# Allegro board maxm86161_adptr_evkit_b.brd
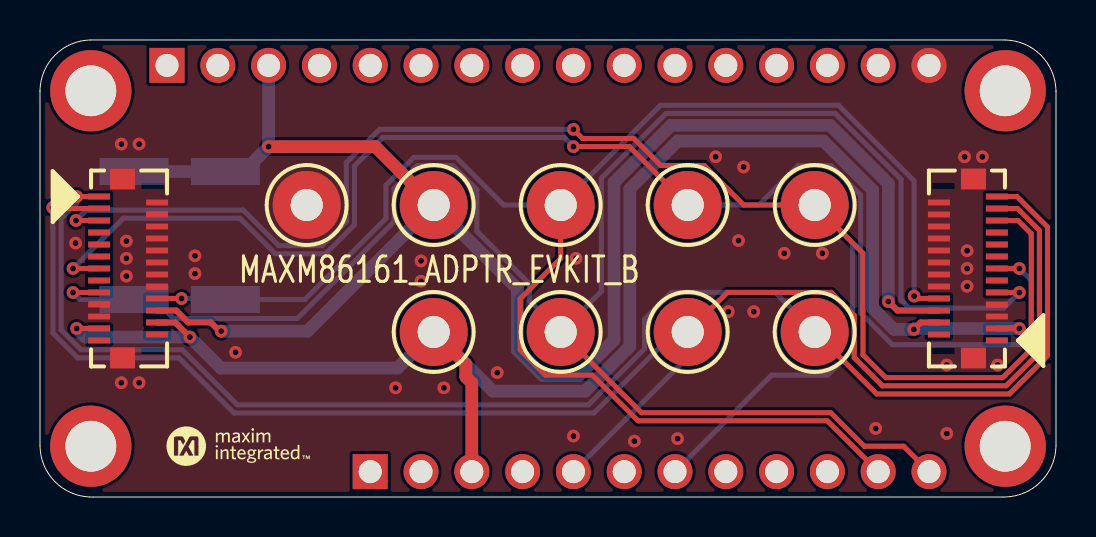
[diagram p0: board, top side]
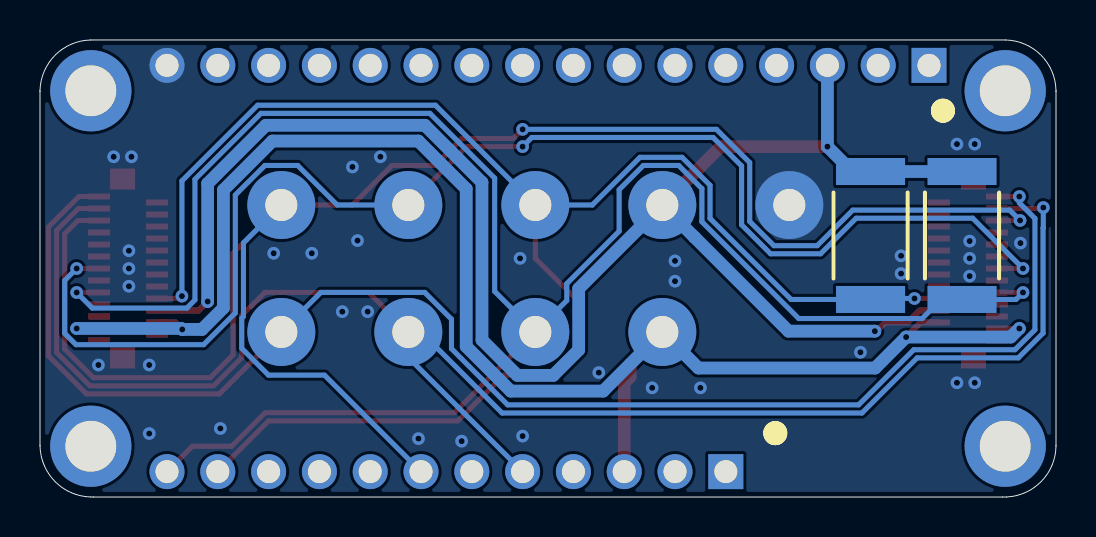
[diagram p1: board, bottom side, seen from below]

Outline 50.8 x 22.86 mm; copper layers: TOP, BOTTOM. Coordinates in mm from the lower left corner of the outline.
Outline path: 0,20.27 0,2.6 0,2.55 arc(0.74,0.78) 2.48,0 2.67,0 48.13,0 48.25,0 arc(50.04,0.76) 50.8,2.55 50.8,2.6 50.8,20.27 50.8,20.33 arc(50.04,22.1) 48.27,22.86 48.15,22.86 2.52,22.86 arc(0.75,22.1) 0,20.33 0,20.27

## Design rules (mm)
constraint set DEFAULT: min track width 0.254

## Placement (name value [footprint] x y rotation side)
ACCINTN  N/A  [KEYS_5013]  38.73 8.25 0 top
GND  N/A  [KEYS_5011]  13.33 14.61 0 top
J1  5016162575  [MOLEX_501616-2575]  4.45 11.43 270 top
J2  5016162575  [MOLEX_501616-2575]  46.35 11.43 90 top
J3  PBC12SAAN  [SULLINS_PXC12SAAN]  16.51 1.27 0 bottom
J4  PBC16SAAN  [SULLINS_PXC16SAAN]  6.35 21.59 0 bottom
MFIO  N/A  [KEYS_5127]  38.73 14.61 0 top
NOREF  -  []  12.7 -12.7 0 top
NOREF#2  -  []  154.05 1.27 0 top
NOREF#3  -  []  48.26 0 90 top
NOREF#4  -  [unnamed#2]  2.54 2.54 0 top
NOREF#5  -  [unnamed#2]  48.26 2.54 0 top
NOREF#6  -  []  0.54 1 0 top
NOREF#7  -  []  0 20.27 0 top
NOREF#8  -  [unnamed#2]  2.54 20.32 0 top
NOREF#9  -  []  7.3 2.54 0 top
NOREF#10  -  [unnamed#2]  48.26 20.32 0 top
NOREF#11  -  []  27.94 60.96 0 top
OPTINT  N/A  [KEYS_5126]  32.38 14.61 0 top
R1  10K  [RESC6432X76M]  4.7 13.08 270 bottom
R2  10K  [RESC6432X76M]  9.27 13.08 270 bottom
RSTN  N/A  [KEYS_5014]  32.38 8.25 0 top
SCL  N/A  [KEYSTONE_5128]  26.04 14.61 0 top
SDA  N/A  [TP_C340H160]  26.04 8.25 0 top
UNK1V8  N/A  [KEYS_5011]  19.68 14.61 0 top
VLED  N/A  [KEYS_5012]  19.68 8.25 0 top

## Library data of the parts
ACCINTN = TP: part number: TP_TP-KEYS_5013,N/A,02-TPMINI5013-00
GND UNK1V8 = TP: alternate symbols: TP_C340H160L; part number: TP_TP-KEYS_5011,N/A,02-TPMINI5011-00
J1 J2 = 501616-2575: part number: 501616-2575_RA-MOLEX_501616-2575,5016162575,01-501616257525P-29
J3 = HEADER_12P: part number: HEADER_12P_SIP-SULLINS_PXC12SAAN,PBC12SAAN,01-PBC12SAAN12P-21
J4 = HEADER_16P: part number: HEADER_16P_SIP-SULLINS_PXC16SAAN,PBC16SAAN,01-PBC16SAAN16P-21
MFIO = TP: part number: TP_TP-KEYS_5127,N/A,02-TPMULTI5127-00
OPTINT = TP: part number: TP_TP-KEYS_5126,N/A,02-TPMULTI5126-00
R1 R2 = RES: part number: RES_2512RES-RESC6432X76M,10K,80-0010K-AA72
RSTN = TP: part number: TP_TP-KEYS_5014,N/A,02-TPMINI5014-00
SCL = TP: part number: TP_TP-KEYSTONE_5128,N/A,02-TPMULTI5128-00
SDA = TP: part number: TP_TP-TP_C340H160,N/A,02-TPMINI5125-00
VLED = TP: part number: TP_TP-KEYS_5012,N/A,02-TPMINI5012-00

## Footprints (pads in the part's own frame, mm; a bottom-side part is the same pattern mirrored in y, then rotated)
KEYS_5011
  round 3.4 hole 1.6: 1(0,0)
KEYS_5012
  round 3.4 hole 1.6: 1(0,0)
KEYS_5013
  round 3.4 hole 1.6: 1(0,0)
KEYS_5014
  round 3.4 hole 1.6: 1(0,0)
KEYS_5126
  round 3.4 hole 1.6: 1(0,0)
KEYS_5127
  round 3.4 hole 1.6: 1(0,0)
KEYSTONE_5128
  round 3.4 hole 1.6: 1(0,0)
MOLEX_501616-2575
  rect 0.3x1.1 smd: 1(-3.6,-1.5) 2(-3.3,1.4) 3(-3,-1.5) 4(-2.7,1.4) 5(-2.4,-1.5) 6(-2.1,1.4) 7(-1.8,-1.5) 8(-1.5,1.4) 9(-1.2,-1.5) 10(-0.9,1.4) 11(-0.6,-1.5) 12(-0.3,1.4) 13(0,-1.5) 14(0.3,1.4) 15(0.6,-1.5) 16(0.9,1.4) 17(1.2,-1.5) 18(1.5,1.4) 19(1.8,-1.5) 20(2.1,1.4) 21(2.4,-1.5) 22(2.7,1.4) 23(3,-1.5) 24(3.3,1.4) 25(3.6,-1.5)
  rect 1.05x1.25 smd: 26(-4.475,-0.325) 27(4.475,-0.325)
RESC6432X76M
  rect 1.35x3.45 smd: 1(-3.2,0) 2(3.2,0)
SULLINS_PXC12SAAN
  rect 1.75x1.75 hole 1.15: 1(0,0)
  round 1.75 hole 1.15: 2(2.54,0) 3(5.08,0) 4(7.62,0) 5(10.16,0) 6(12.7,0) 7(15.24,0) 8(17.78,0) 9(20.32,0) 10(22.86,0) 11(25.4,0) 12(27.94,0)
SULLINS_PXC16SAAN
  rect 1.75x1.75 hole 1.15: 1(0,0)
  round 1.75 hole 1.15: 2(2.54,0) 3(5.08,0) 4(7.62,0) 5(10.16,0) 6(12.7,0) 7(15.24,0) 8(17.78,0) 9(20.32,0) 10(22.86,0) 11(25.4,0) 12(27.94,0) 13(30.48,0) 14(33.02,0) 15(35.56,0) 16(38.1,0)
TP_C340H160
  round 3.4 hole 1.6: 1(0,0)
unnamed#2
  round 4.064 hole 2.54: (0,0)

## Nets
1V8: J1.20 J2.6 J4.3 R1.1 R2.1 UNK1V8.1
GND_SIGNAL_1: GND.1(TP1) J1.2 J1.4 J1.6 J1.8 J1.10 J1.12 J1.14 J1.16 J1.19 J1.21 J1.26 J1.27 J2.5 J2.7 J2.10 J2.12 J2.14 J2.16 J2.18 J2.20 J2.22 J2.24 J2.26 J2.27 J4.16
ACCINTN: ACCINTN.1(TP1) J1.1 J2.25
MFIO: J1.5 J2.21 J3.7 MFIO.1(TP1)
OPTINT: J1.13 J2.13 OPTINT.1(TP1)
RSTN: J1.3 J2.23 J3.5 RSTN.1(TP1)
SCL: J1.18 J2.8 J3.11 R2.2 SCL.1(TP1)
SDA: J1.17 J2.9 J3.12 R1.2 SDA.1(TP1)
VLED: J1.22 J1.23 J2.3 J2.4 J3.3 VLED.1(TP1)

Pads without a net: J1 7 9 11 15 24 25; J2 1 2 11 15 17 19; J3 1 2 4 6 8 9 10; J4 1 2 4 5 6 7 8 9 10 11 12 13 14 15

## Via types
v1: diameter 0.635, hole 0.305, TOP to BOTTOM, 54 vias

## Routing (per net, layer and track width the routed paths; a pad name or vN(x,y) marks a point on that pad's centre or on a via; arc(x,y) is an arc through that point)
1V8: length 85.3
  TOP w0.305: v1(9.06,8.3) 8.98,8.3 8.54,8.74 7.4,8.74 6.81,9.33 J1.20 ; v1(42.42,9.78) 42.87,9.33 J2.6
  TOP w0.635: UNK1V8.1 16.76,17.53 v1(11.43,17.53)
  BOTTOM w0.635: J4.3 v1(11.43,17.53) 10.18,16.28 R2.1 R1.1 ; v1(9.06,8.3) 13.38,8.3 18.08,13 UNK1V8.1 23.87,10.42 23.87,7.36 25.14,6.09 26.93,6.09 28.7,7.85 28.7,15.74 31.55,18.59 39.5,18.59 42.42,15.68 v1(42.42,9.78)
GND_SIGNAL_1:
  vias: v1(1.78,12.7) v1(4.06,17.65) v1(4.06,5.71) v1(4.32,12.8) v1(4.32,11.94) v1(4.32,11.05) v1(4.95,17.65) v1(4.95,5.71) v1(7.75,12.06) v1(7.75,11.18) v1(9.78,7.24) v1(17.78,5.46) v1(19.05,11.81) v1(19.05,10.79) v1(20.19,5.46) v1(22.86,6.22) v1(26.67,3.05) v1(26.8,11.94) v1(29.72,2.79) v1(31.88,2.92) v1(33.78,17.02) v1(34.42,9.27) v1(34.92,12.83) v1(35.18,16.51) v1(35.69,9.27) v1(37.21,12.19) v1(39.12,12.19) v1(41.78,3.43) v1(45.34,6.6) v1(45.34,3.17) v1(46.23,17.02) v1(46.35,12.32) v1(46.35,11.43) v1(46.35,10.54) v1(47.12,17.02) v1(47.88,6.6)
ACCINTN: length 74.7
  TOP w0.254: J1.1 v1(1.83,15.03) ; ACCINTN.1 41.83,5.16 48.47,5.16 50.38,7.06 50.38,13.5 48.85,15.03 J2.25
  BOTTOM w0.254: v1(1.83,15.03) 1.83,14.71 1.05,13.93 1.05,8.36 2.05,7.37 7.11,7.37 9.87,4.61 27.42,4.61 30.23,7.42 30.23,8.9 31.57,10.23 36.76,10.23 ACCINTN.1
MFIO: length 90
  TOP w0.254: J1.5 1.92,13.83 1.91,13.83 v1(1.8,13.83) ; v1(26.67,18.39) 27.13,17.93 29.69,17.93 31.04,16.58 33.21,16.58 35.18,14.61 MFIO.1 41.15,12.19 41.15,7.11 42.29,5.97 48.13,5.97 49.56,7.4 49.56,13.17 48.9,13.83 J2.21
  BOTTOM w0.254: v1(1.8,13.83) 2.31,14.35 10.16,14.35 11.94,12.57 14.1,12.57 15.31,13.78 15.31,16.73 16.98,18.39 v1(26.67,18.39) ; MFIO.1 40.63,12.71 40.63,9.04 40.71,8.95 40.71,7.43 39.38,6.1 36.58,6.1 J3.7
OPTINT: length 69.4
  TOP w0.254: v1(26.67,17.53) 29.46,17.53 OPTINT.1 ; J1.13 v1(1.65,11.43) ; J2.13 v1(48.97,11.43)
  BOTTOM w0.254: v1(1.65,11.43) 4.17,13.94 9.99,13.94 11.77,12.17 14.27,12.17 15.72,13.62 15.72,16.56 17.14,17.98 26.21,17.98 v1(26.67,17.53) ; v1(48.97,11.43) 49.56,10.83 49.56,8.18 49,7.62 42.62,7.62 41.03,9.21 41.03,15.11 39.56,16.58 37.91,16.58 35.94,14.61 OPTINT.1
RSTN: length 84
  TOP w0.254: RSTN.1 34.36,10.23 39.56,10.23 40.71,9.08 40.71,6.97 42.12,5.56 48.3,5.56 49.97,7.23 49.97,13.34 48.88,14.43 J2.23 ; J1.3 0.68,14.43 v1(0.63,14.48)
  BOTTOM w0.254: J3.5 32.38,6.98 RSTN.1 31.75,8.25 27.7,4.2 9.7,4.2 6.94,6.96 1.88,6.96 0.65,8.2 0.65,13.45 0.63,13.46 v1(0.63,14.48)
SCL: length 82
  TOP w0.254: J2.8 43.82,9.93 v1(43.7,10.05) ; J1.18 v1(7.08,9.93) ; SCL.1 26.04,11.94 24,9.91 24,7.37 25.27,6.1 27.62,6.1 29.91,3.81 39.37,3.81 J3.11
  BOTTOM w0.254: v1(43.7,10.05) 43.7,15.81 39.92,19.6 31.03,19.6 SCL.1 23.19,14.61 20.8,16.99 18.7,16.99 17.3,15.59 17.3,13.94 13.24,9.88 R2.2 9.18,9.88 9.14,9.93 8.34,9.93 8.33,9.93 v1(7.08,9.93)
SDA: length 96.6
  TOP w0.254: J1.17 v1(1.65,10.23) ; J3.12 43.18,2.54 41.21,2.54 39.54,4.22 30.07,4.22 SDA.1 ; J2.9 v1(48.97,10.23)
  BOTTOM w0.254: v1(48.97,10.23) 48.19,9.45 43.46,9.45 43.05,9.86 43.05,15.89 39.75,19.19 31.31,19.19 28.07,15.95 28.07,10.29 SDA.1 24.46,9.83 24.46,10.67 21.84,13.29 21.84,15.37 20.63,16.58 18.86,16.58 17.71,15.43 17.71,13.77 12.86,8.93 6.69,8.93 5.74,9.88 R1.2 2,9.88 v1(1.65,10.23)
VLED: length 80.5
  TOP w0.254: J1.23 v1(1.83,8.43)
  TOP w0.305: v1(7.49,8) 6.76,8.73 J1.22 ; v1(43.69,8.38) 44.04,8.73 J2.4 ; J2.3 v1(48.97,8.43)
  TOP w0.635: J3.3 21.59,5.71 21.29,6.01 21.29,6.65 VLED.1
  BOTTOM w0.635: v1(1.83,8.43) 2.26,8 v1(7.49,8) 9.04,6.45 17.88,6.45 VLED.1 22.64,5.3 27.26,5.3 29.49,7.53 29.49,15.41 31.88,17.81 39.18,17.81 41.63,15.35 41.63,9.45 42.7,8.38 v1(43.69,8.38) 43.74,8.43 v1(48.97,8.43)

## Copper pours and planes (outline as drawn; the poured copper is in the pictures)
GND_SIGNAL_1 on TOP: 2.54,0.25 0.92,0.92 0.25,2.54 0.25,20.32 0.92,21.94 2.54,22.61 48.26,22.61 49.88,21.94 50.55,20.32 50.55,2.54 49.88,0.92 48.26,0.25 ; 4 cut-outs
GND_SIGNAL_1 on BOTTOM: 2.54,0.25 0.92,0.92 0.25,2.54 0.25,20.32 0.92,21.94 2.54,22.61 48.26,22.61 49.88,21.94 50.55,20.32 50.55,2.54 49.88,0.92 48.26,0.25 ; 5 cut-outs

## Text on the board
Ref Des/Silkscreen Top: MAXM86161_ADPTR_EVKIT_B
User.13: NOTES: | FINISH: | TESTING: | MISCELLANEOUS: | TOOLING: | 17.  FINAL ELECTRICAL TEST TO BE PERFORMED USING PROVIDED IPC-D-356A NETLIST OR ODB++ FORMAT FILE. | 18.  A TIME DOMAIN REFLECTOMETER REPORT FOR EACH IMPEDANCE CONTROLLED LAYER AND A CERTIFICATE | 14.  CHECK ALL THAT APPLY | 19. IF PRESENT, ALL BLIND/BURIED VIAS WITH AN ASPECT RATIO <1:1 TO BE PLATED SHUT WITH COPPER WHEN | 20.  FOR ALL DRILL INFORMATION REFER TO DRILL CHART. | 21.  FINISHED SURFACE CONTACTS AND FILLED VIAS TO BE FREE OF ANY PITS. SCRATCHES PROBE MARKS | 23.  PEMNUT | 13.  DRILL SIZES ARE FINISHED HOLE SIZES. ALL HOLES SHALL BE LOCATED WITHIN .005 DTP,UNLESS SPECIFIED. | 15.  CHECK ALL THAT APPLY | 22.  THIEVING: | 16.  VENDOR LOGO & DATE CODE REQUIREMENT.  DATE CODE FORMAT MUST BE YYWW ONLY | 9.  ALL TRACES FILLETED OPTION TO ENHANCE RELIABILITY AT PAD JUNCTIONS | 10.  LAYER TO LAYER REGISTRATIONS SHALL BE WITHIN .003 INCHES. | MATERIAL: | 11.  FINISHED COPPER WEIGHT/THICKNESS: | 12.  CHECK ALL THAT APPLY | 1.  DIMENSIONS ARE IN INCHES (EXCEPT WHERE NOTED). | 3.  THE PCB SHALL BE FABRICATED TO IPC-6012, TYPE X, CLASS 2. | 4.  BOARD MATERIAL & CONSTRUCTION SHALL MEET THE REQUIREMENTS OF UL796 | 5.  OVERALL BOARD THICKNESS REFER TO LAMINATION DIAGRAM. TOLERANCE APPLIES | 6.  BOW & TWIST NOT TO EXCEED 0.0075 IN. (0.75%) PER LINEAR INCH. | 7.  PHOTO ETCH CIRCUITRY PER ENCLOSED GERBER RS274X OR ODB++ FORMAT FILE. | 8.  IMPEDANCE REQUIREMENTS: IF NO STACKUP IS DEFINED, THE VENDOR IS ALLOWED TO ADJUST THE DIELECTRIC | 2.  BOARD MATERIAL: | ( )  FINISH CONDUCTOR SURFACES: IMMERSION GOLD, 2-5 MICRO INCHES OVER | ( )  OTHER | (X)  REFER TO LAMINATION DIAGRAM FOR FINISHED COPPER WEIGHT/THICKNESS REQUIREMENTS. | ( )  OTHER ________________________ | ( )  FINGERS TO BE GOLD PLATED. | (X)  LEAD FREE AND RoHS COMPLIANT PLATING(OSP NOT INCLUDED). | (X) CUSTOM MAXIM TEAL SOLDER MASK. PANTONE #326C WHEN AVAILABLE. | ( )  ELECTRODEPOSITED HARD GOLD PLATE, TYPE 1 (99.7% MIN GOLD), GRADE C | (X)  PLACE ON BOTTOM LEGEND LAYER. IF NO BOTTOM LEGEND SUPPLIED, CREATE BOTTOM LEGEND LAYER TO ADD. | ( )  PLACE ON TOP LEGEND LAYER. IF NO TOP LEGEND SUPPLIED,CREATE TOP LEGEND LAYER TO ADD. | (X)  APPLY SILKSCREEN USING A NON-CONDUCTIVE, WHITE EPOXY | MINIMUM BARREL PLATING OF .001 IN. PLATED HOLES SHALL NOT BE ROUGH OR IRREGULAR | SO AS TO HINDER PROPER SOLDER WICKING. | USED AS VIA-IN PAD OR AS A STACKED VIA. BLIND/BURIED VIAS WITH AN ASPECT RATIO >1:1 TO BE FILLED | WITH NON-CONDUCTIVE EPOXY. UNLESS OTHERWISE SPECIFIED. | ( )  NON-CONDUCTIVE EPOXY. FILL AND CAP ALL 0.XXXX INCH DRILLED VIAS. | ( )  SILVER. FILL AND CAP ALL 0.XXXX INCH DRILLED VIAS. | (REQUIRED UNLESS OTHERWISE SPECIFIED IN QUOTE) | THE PCB SHALL HAVE A VERIFICATION STAMP. | OR OTHER DEFORMITIES THAT COULD EFFECT THE APPERANCE AND PERFORMACE OF THE CONTACT | SURFACE. CONTACTS ARE TO BE AS FLAT AS POSSIBLE. NOT TO EXCEED +/- 0.001" OF FLATNESS. | OF COMPLIANCE SHALL BE PROVIDED BY VENDOR AT TIME OF SHIPMENT. INSTANCES WHERE TDR TESTING | CAN'T BE PERFORMED BECAUSE THE TRACE LENGTH IS TOO SHORT ON THE OUTER LAYERS AT THE PIN ESCAPES | IS ACCEPTABLE, ALL OTHER INSTANCES MUST BE REPORTED. | ( )  SUPPLIER MAY ADD THIEVING TO COMPENSATE FOR LOW COPPER DENSITY AREAS ON THIS DESIGN. | WHERE SPACING PERMITS. | LEGEND TO LEGEND +/- 0.007 INCHES | (X)  SUPPLIER MAY NOT ADD THIEVING TO COMPENSATE FOR LOW COPPER DENSITY AREAS ON THIS DESIGN. | ( )  PEMNUTS TO BE INSTALLED BY FABRICATOR.. | ( )  PEMNUTS NOT TO BE INSTALLED BY FABRICATOR. | (X)  NOT APPLICABLE. | ( )  FILLETED | (X)  NOT FILLETED | (X)  ISOLA 370HR OR EQUIVALENT | ( )  NELCO-4000-13 | ( )  MEGTRON 6 | ( )  ROGERS 4350B | ( )  ROGERS 4003C | ( )  ISOLA-FR408HR OR EQUIVALENT | WORKMANSHIP SHALL CONFORM TO IPC-A-600, CLASS 2, CURRENT REVISIONS. | WITH FLAMMABILITY RATING OF 94V-O. | AFTER ALL LAMINATION AND PLATING PROCESSES. IT IS TO BE MEASURED FROM | TOP PCB METAL TO BOTTOM PCB METAL UNLESS OTHERWISE SPECIFIED. | BOW & TWIST SHOULD BE MEASURED PER IPC-TM-650, METHOD 2.4.22. | DRILL LOCATION AND SIZE CONTROLLED BY EXCELLON CNC DRILL FILE. | THICKNESS AND TRACE WIDTHS TO MEET THE IMPEDANCE REQUIREMENT. IF SPECIFIED, VENDOR MUST FOLLOW AND | MEET THE REQUIREMENTS LISTED IN THE IMPEDANCE TABLE. ANY ADJUSTMENTS MADE TO THE DEFINED STACKUP, | TRACE WIDTH & SPACING THAT IMPACT THE REQUIREMENTS MUST HAVE WRITTEN APPROVAL FROM MAXIM. | UNLESS OTHERWISE SPECIFIED | CLASS 3 (50-100 MICROINCHES THICK) OVER ELECTRODEPOSITED NICKEL PLATE | THE STARTING COPPER WEIGHT/THICKNESS CAN VARY AS LONG AS THE FINISHED COPPER | WEIGHT/THICKNESS IS NOT LESS THAN THE SPECIFIED VALUE, UNLESS OTHERWISE SPECIFIED. | (KNOOP HARDNESS 130-200), CLASS 1 (50-100 MICRO INCHES THICK) IN ACCORDANCE WITH MIL-G-45204C. | GENERAL SURFACING REQUIREMENTS MUST MEET ANSI/IPC-A-600(CURRENT REV) SECTION 4.0, | IN ACCORDANCE WITH ANSI/IPC-A-600D, SECTION 4.0, CLASS 3 (200-600 MICROINCHES THICK). | 118-236 MICRO INCHES MINIMUM OF ELECTROLESS NICKEL. | BASED INK PER ARTWORK. | (USE CHECKED ITEMS FOR MATERIAL) | (USE CHECKED ITEMS FOR PLATING) | (USE CHECKED ITEMS FOR TOOLING) | UNLESS OTHERWISE SPECIFIED: | MAXM86161_ADPTR_EVKIT_B
User.39: FIGURE | SIZE | 12.0 | 45.28 | 62.99 | 100.0 | TOLERANCE | +3.0/-10.0 | +3.0/-3.0 | PLATED | ALL UNITS ARE IN MILS | QTY | 54 | 28 | 9 | 4 | NOTES | DRILL CHART: TOP to BOTTOM
